# EAGLE board LM4702 (EAGLE 5.07)
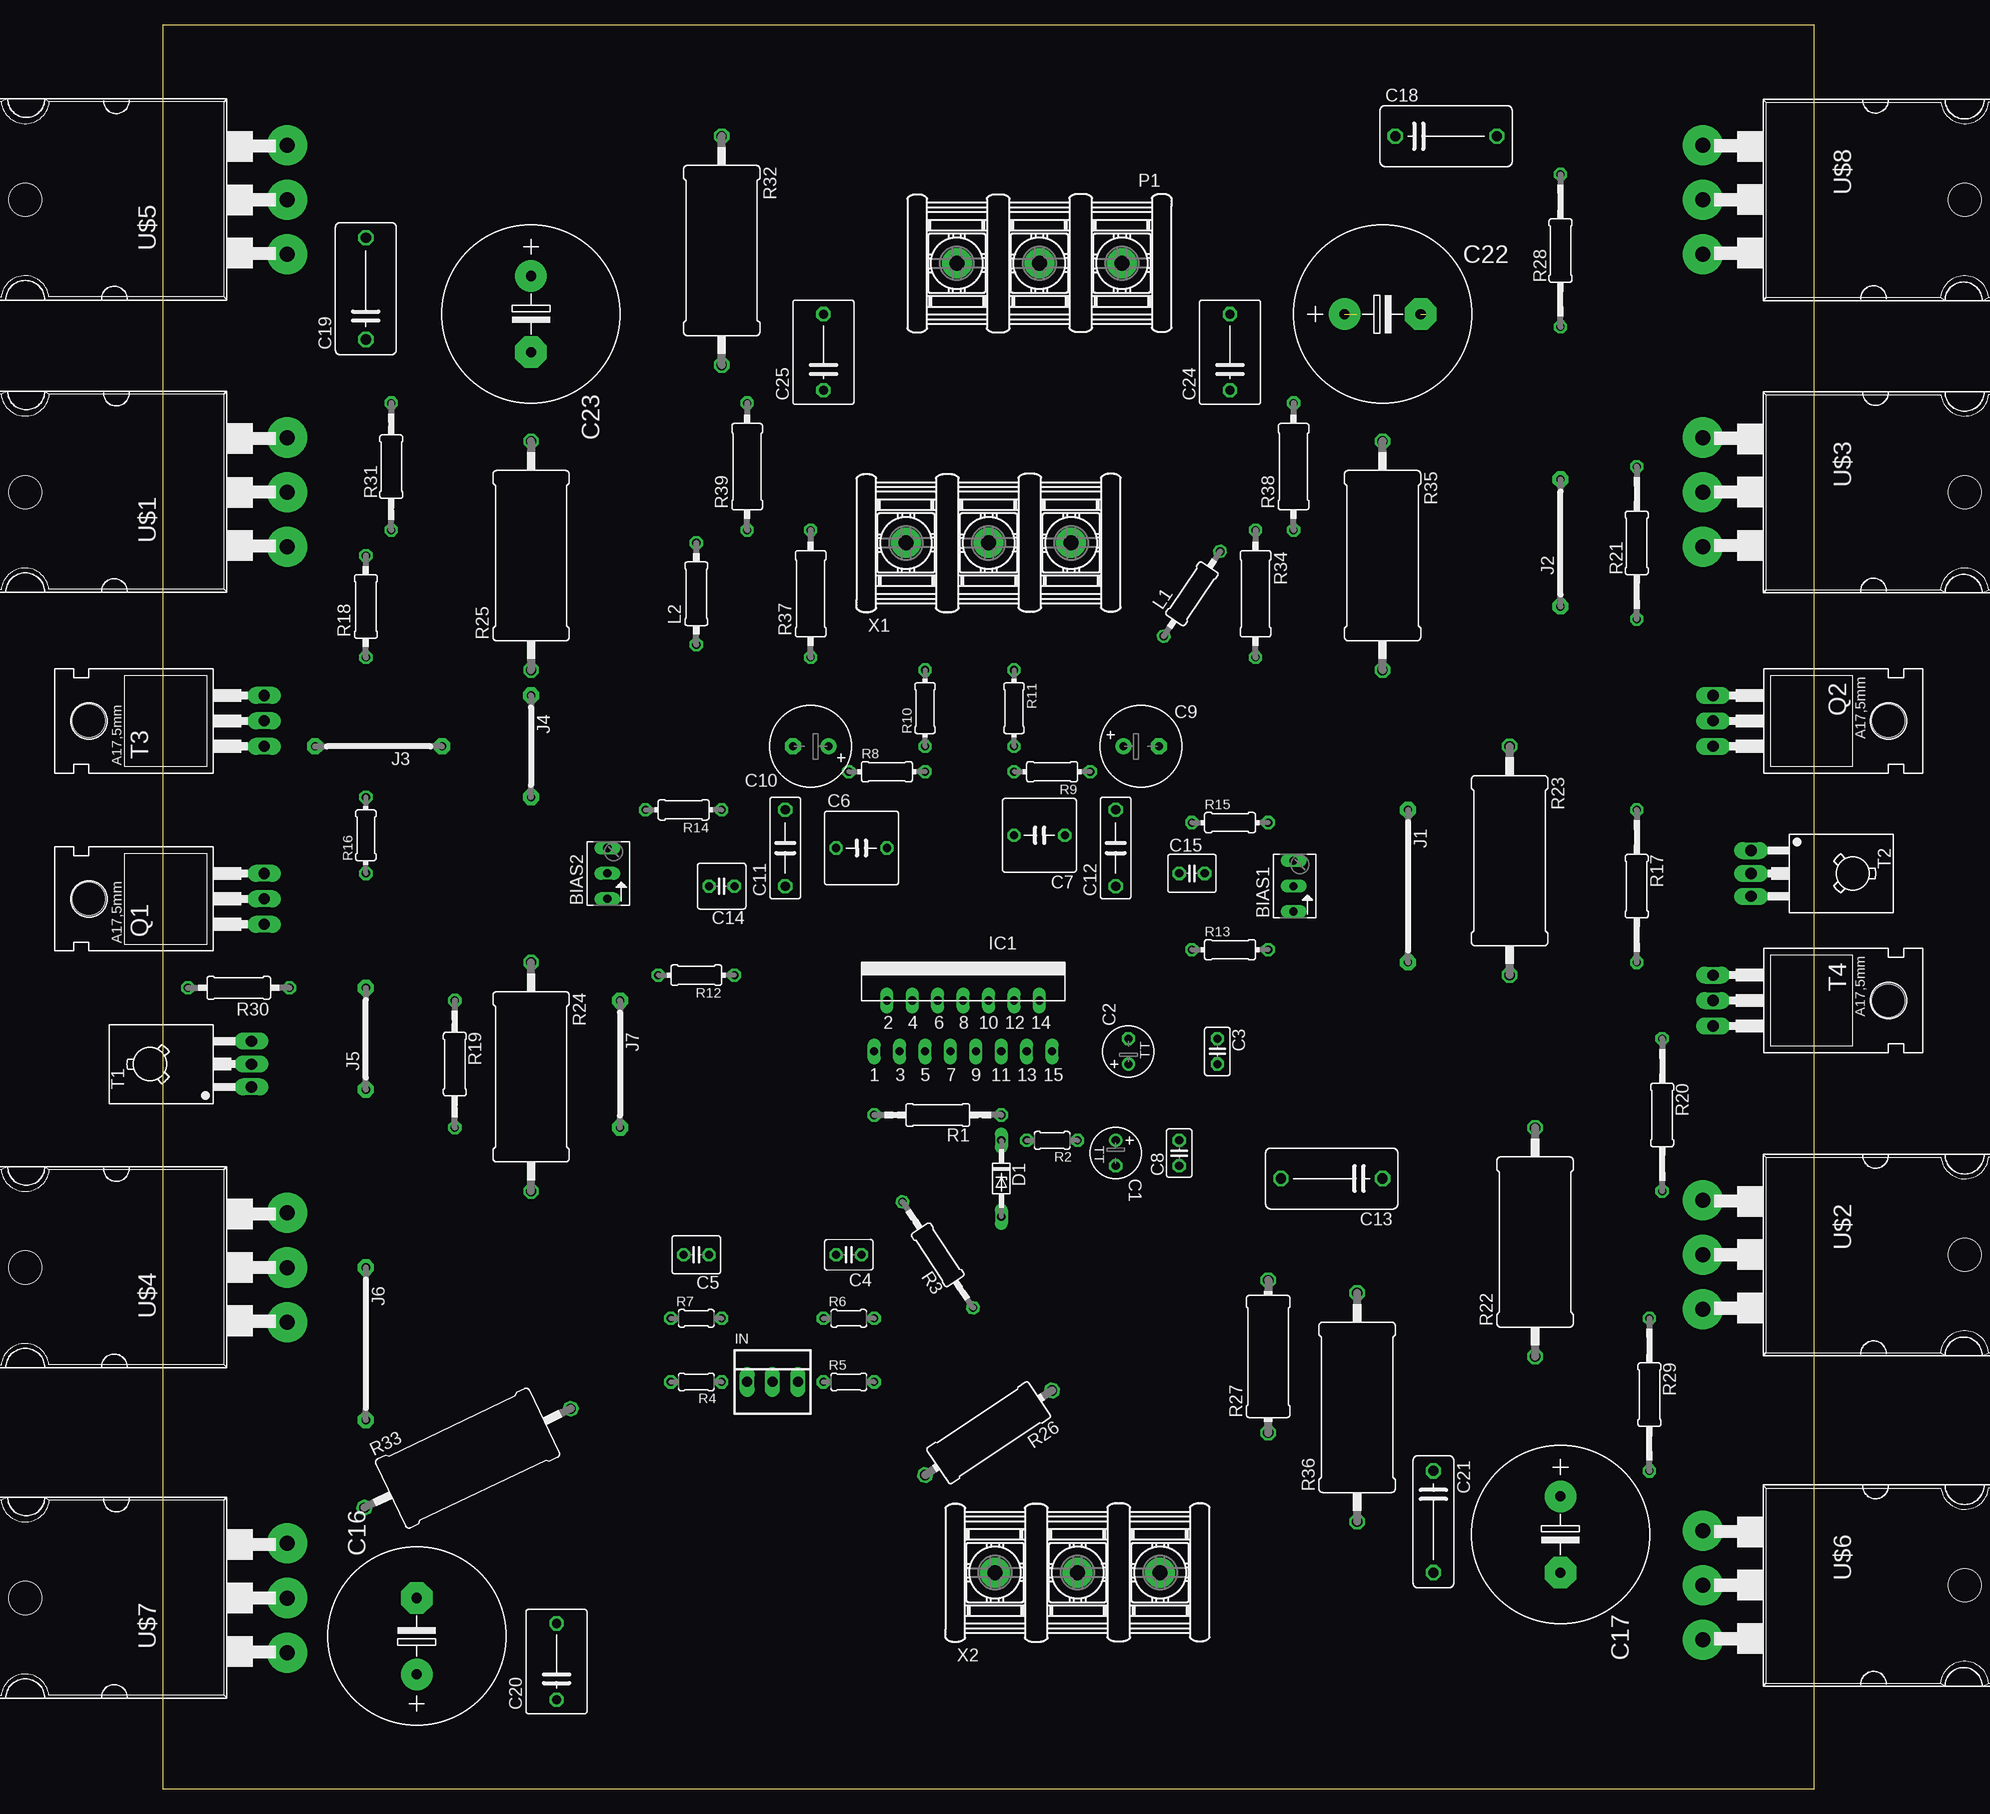
[diagram p0: board, top side]
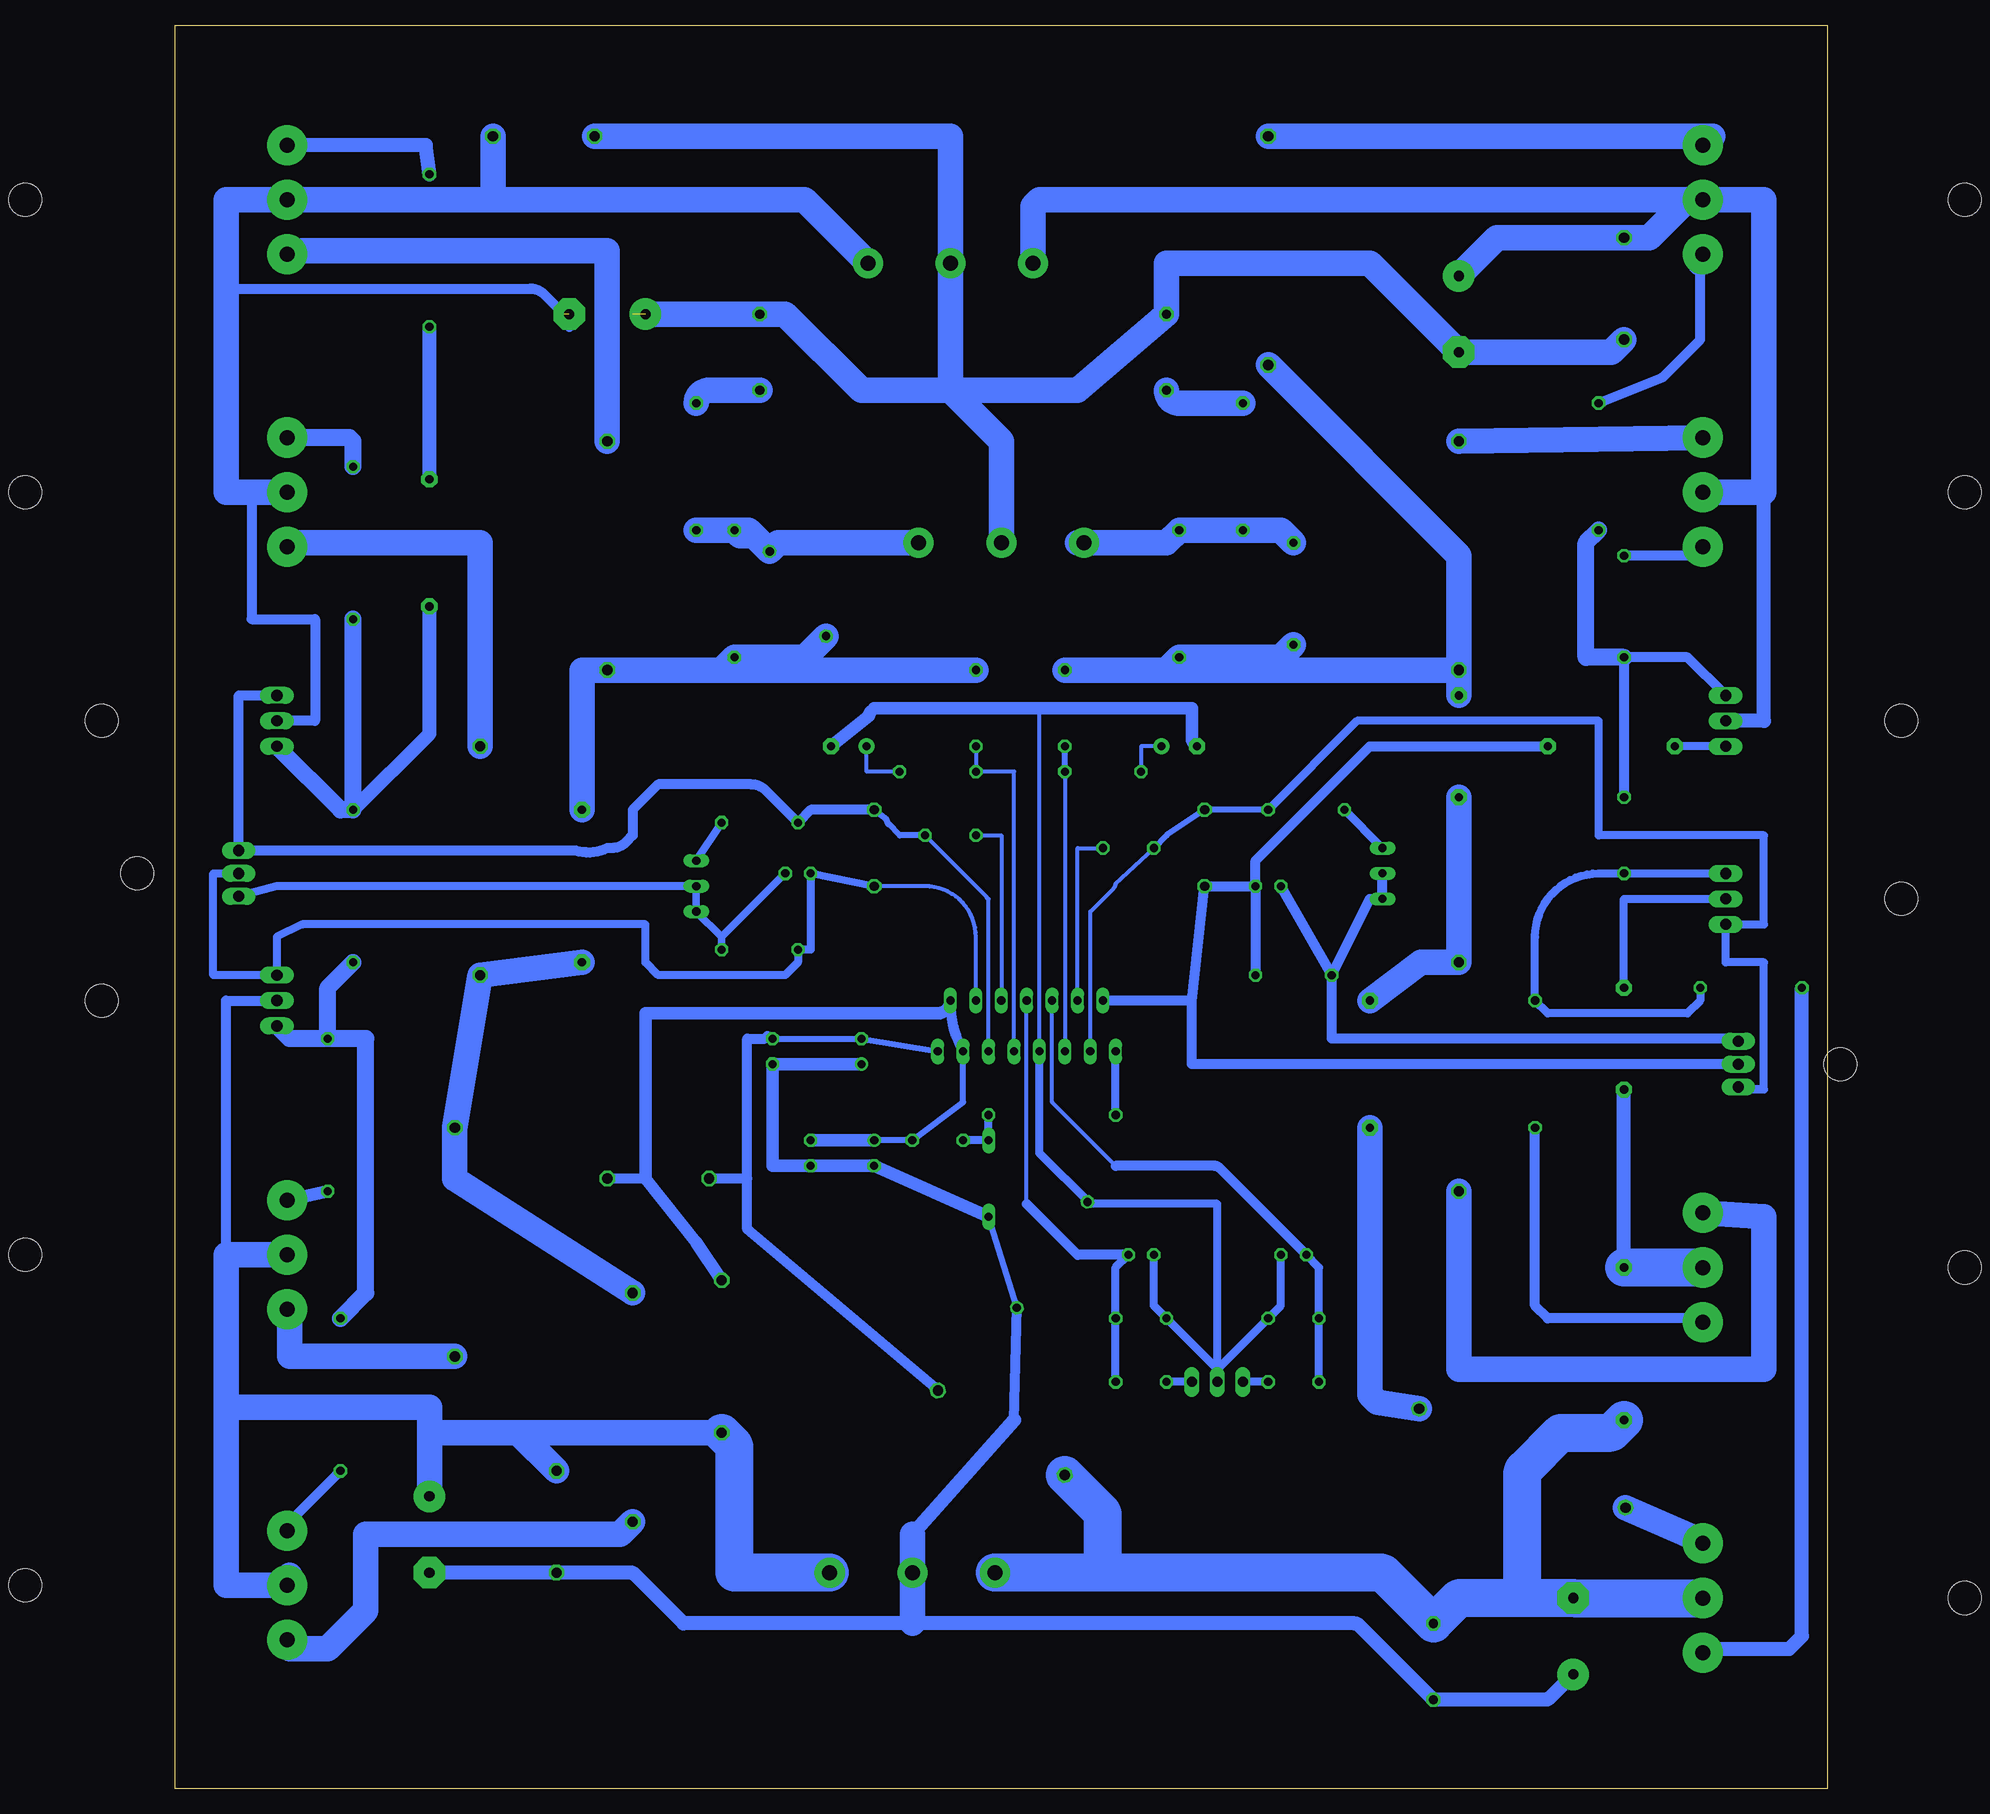
[diagram p1: board, bottom side, seen from below]

Size 165.08 x 176.2 mm. Coordinates in mm from the lower left corner, seen from the top.
Outline: 0,0 165.08,0 165.08,176.2 0,176.2 0,0
Copper layers (1*16): Top 0.035mm / dielectric 1.5mm / Bottom 0.035mm
Design rules "default *": minimum track width 24mil, minimum drill 24mil, track to track 8mil, track to pad 8mil, pad to pad 8mil, via to via 8mil, smd to smd 8mil, copper to edge 40mil, drill to drill 8mil, minimum pad ring 10mil, minimum via ring 8mil, stop-mask expansion 4mil, vias tented up to drill 0mil, thermal gap 10mil

## Footprints (pad centres in the part's own frame; a part is rotated, then mirrored left to right if it is on the bottom)
B64Y = drill 0.813 long: A 2.54,0; E -2.54,0; S 0,0
TT2D5 = drill 0.813 round: + -1.27,0 | drill 0.813 octagon: - 1.27,0
C025-025X050 = drill 0.813 octagon: 1 -1.27,0; 2 1.27,0
C025-030X050 = drill 0.813 octagon: 1 -1.27,0; 2 1.27,0
C025-040X050 = drill 0.813 octagon: 1 -1.27,0; 2 1.27,0
C050-075X075 = drill 0.813 octagon: 1 -2.54,0; 2 2.54,0
E3,5-8 = drill 0.813 pad 1.6 round: + -1.778,0 | drill 0.813 pad 1.6 octagon: - 1.778,0
C075-032X103 = drill 0.914 octagon: 1 -3.81,0; 2 3.81,0
C102-064X133 = drill 1.016 octagon: 1 -5.08,0; 2 5.08,0
C025-050X050 = drill 0.813 octagon: 1 -1.27,0; 2 1.27,0
E7,5-18 = drill 1.016 pad 3.15 round: + -3.81,0 | drill 1.016 pad 3.15 octagon: - 3.81,0
C075-063X106 = drill 0.914 octagon: 1 -3.81,0; 2 3.81,0
C102-043X133 = drill 1.016 octagon: 1 -5.08,0; 2 5.08,0
DO34Z7 = drill 0.813 long: A 3.81,0; C -3.81,0
SIP15 = drill 0.813 pad 1.321 long: 1 -8.89,-2.54; 2 -7.62,2.54; 3 -6.35,-2.54; 4 -5.08,2.54; 5 -3.81,-2.54; 6 -2.54,2.54; 7 -1.27,-2.54; 8 0,2.54; 9 1.27,-2.54; 10 2.54,2.54; 11 3.81,-2.54; 12 5.08,2.54; 13 6.35,-2.54; 14 7.62,2.54; 15 8.89,-2.54
22-23-2031 = drill 1 long: 1 -2.54,0; 2 0,0; 3 2.54,0
15 = drill 0.813 pad 1.6 octagon: 1 -7.62,0; 2 7.62,0
12 = drill 0.813 pad 1.6 octagon: 1 -6.35,0; 2 6.35,0
10 = drill 0.813 pad 1.6 octagon: 1 -5.08,0; 2 5.08,0
0207/10 = drill 0.813 octagon: 1 -5.08,0; 2 5.08,0
5202-03-N-02 = drill 1.5 pad 3 round: 1 -8.25,0; 2 0,0; 3 8.25,0
TO220 = drill 1.118 long: 1 -2.54,-6.35; 2 0,-6.35; 3 2.54,-6.35 | hole 3.302: 0,11.176
0207/12 = drill 0.813 octagon: 1 -6.35,0; 2 6.35,0
0204/5 = drill 0.813 octagon: 1 -2.54,0; 2 2.54,0
0204/7 = drill 0.813 octagon: 1 -3.81,0; 2 3.81,0
0207/15 = drill 0.813 octagon: 1 -7.62,0; 2 7.62,0
P0817/22 = drill 1.016 octagon: 1 -11.43,0; 2 11.43,0
0414/15 = drill 1.016 octagon: 1 -7.62,0; 2 7.62,0
0309/12 = drill 0.813 octagon: 1 -6.35,0; 2 6.35,0
TO126 = drill 1.118 long: 1 -2.286,-5.08; 2 0,-5.08; 3 2.286,-5.08 | hole 3.302: 0,5.08
TO-264 = drill 1.5 pad 4 round: B -5.45,-6.096; E 5.45,-6.096 | drill 1.499 pad 4 round: C 0,-6.096 | hole 3.3: 0,20.09

## Placement (x,y rotation side)
BIAS1  200R  [B64Y]  113.03,90.17 90 top
BIAS2  200R  [B64Y]  44.45,91.44 90 top
C1  10uF  [TT2D5]  95.25,63.5 270.1 top
C2  10uF  [TT2D5]  96.52,73.66 90 top
C3  .1  [C025-025X050]  105.41,73.66 270 top
C4  47pF  [C025-030X050]  68.58,53.34 180.2 top
C5  47pF  [C025-040X050]  53.34,53.34 180 top
C6  47pF  [C050-075X075]  69.85,93.98 0 top
C7  47pF  [C050-075X075]  87.63,95.25 180 top
C8  .1  [C025-025X050]  101.6,63.5 90 top
C9  200uF  [E3,5-8]  97.79,104.14 0 top
C10  200uF  [E3,5-8]  64.77,104.14 180 top
C11  15nf  [C075-032X103]  62.23,93.98 90 top
C12  15nf  [C075-032X103]  95.25,93.98 90 top
C13  .27  [C102-064X133]  116.84,60.96 180 top
C14  47pf  [C025-050X050]  55.88,90.17 180 top
C15  47pf  [C025-040X050]  102.87,91.44 0 top
C16  100uF  [E7,5-18]  25.4,15.24 90 top
C17  100uF  [E7,5-18]  139.7,25.4 270 top
C18  .1  [C102-064X133]  128.27,165.1 0 top
C19  .1  [C102-064X133]  20.32,149.86 90 top
C20  .1  [C075-063X106]  39.37,12.7 90 top
C21  .1  [C102-043X133]  127,26.67 270 top
C22  100uF  [E7,5-18]  121.92,147.32 0 top
C23  100uF  [E7,5-18]  36.83,147.32 270 top
C24  .1  [C075-063X106]  106.68,143.51 90 top
C25  .1  [C075-063X106]  66.04,143.51 90 top
D1  BZV10  [DO34Z7]  83.82,60.96 270 top
IC1  LM4702  [SIP15]  80.01,76.2 0 top
IN  Input  [22-23-2031]  60.96,40.64 0 top
J1  J15MM  [15]  124.46,90.17 270 top
J2  J12MM  [12]  139.7,124.46 90 top
J3  J12MM  [12]  21.59,104.14 180 top
J4  J10MM  [10]  36.83,104.14 270 top
J5  J10MM  [10]  20.32,74.93 90 top
J6  J15MM  [15]  20.32,44.45 270 top
J7  J12MM  [12]  45.72,72.39 270 top
L1  3uH  [0207/10]  102.87,119.38 56.3 top
L2  3uH  [0207/10]  53.34,119.38 90 top
P1  (V+) (GND) (V-)  [5202-03-N-02]  87.63,152.4 180 top
Q1  MJE15031  [TO220]  3.81,88.9 90 top
Q2  MJE15031  [TO220]  161.29,106.68 270 top
R1  27K  [0207/12]  77.47,67.31 180 top
R2  33K  [0204/5]  88.9,64.77 180 top
R3  0.0  [0207/12]  77.47,53.34 123.8 top
R4  2.7K  [0204/5]  53.34,40.64 180 top
R5  2.7K  [0204/5]  68.58,40.64 0 top
R6  68K  [0204/5]  68.58,46.99 0 top
R7  68K  [0204/5]  53.34,46.99 0 top
R8  2.7k  [0204/7]  72.39,101.6 0 top
R9  2.7k  [0204/7]  88.9,101.6 180 top
R10  68k  [0204/7]  76.2,107.95 90 top
R11  68k  [0204/7]  85.09,107.95 270 top
R12  1.2k  [0204/7]  53.34,81.28 180 top
R13  1.2k  [0204/7]  106.68,83.82 0 top
R14  290  [0204/7]  52.07,97.79 180 top
R15  290  [0204/7]  106.68,96.52 0 top
R16  220  [0204/7]  20.32,95.25 90 top
R17  220  [0207/15]  147.32,90.17 270 top
R18  10  [0207/10]  20.32,118.11 90 top
R19  10  [0207/12]  29.21,72.39 270 top
R20  10  [0207/15]  149.86,67.31 270 top
R21  10  [0207/15]  147.32,124.46 90 top
R22  .47  [P0817/22]  137.16,54.61 90 top
R23  .47  [P0817/22]  134.62,92.71 270 top
R24  .47  [P0817/22]  36.83,71.12 270 top
R25  .47  [P0817/22]  36.83,123.19 90 top
R26  10  [0414/15]  82.55,35.56 213.7 top
R27  10  [0414/15]  110.49,43.18 90 top
R28  10  [0207/15]  139.7,153.67 90 top
R29  10  [0207/15]  148.59,39.37 270 top
R30  10  [0207/10]  7.62,80.01 180 top
R31  10  [0207/12]  22.86,132.08 90 top
R32  .47  [P0817/22]  55.88,153.67 270 top
R33  .47  [P0817/22]  30.48,33.02 25.6 top
R34  10  [0309/12]  109.22,119.38 270 top
R35  .47  [P0817/22]  121.92,123.19 270 top
R36  .47  [P0817/22]  119.38,38.1 90 top
R37  10  [0309/12]  64.77,119.38 90 top
R38  10  [0309/12]  113.03,132.08 90 top
R39  10  [0309/12]  58.42,132.08 90 top
T1  BD139  [TO126]  3.81,72.39 90 top
T2  BD139  [TO126]  163.83,91.44 270 top
T3  MJE15030  [TO220]  3.81,106.68 90 top
T4  MJE15030  [TO220]  161.29,78.74 270 top
U$1  2SC5200  [TO-264]  6.35,129.54 90 top
U$2  2SC5200  [TO-264]  160.02,53.34 270 top
U$3  2SA1943  [TO-264]  160.02,129.54 270 top
U$4  2SA1943  [TO-264]  6.35,52.07 90 top
U$5  2SC5200  [TO-264]  6.35,158.75 90 top
U$6  2SA5200  [TO-264]  160.02,20.32 270 top
U$7  2SA1943  [TO-264]  6.35,19.05 90 top
U$8  2SA1943  [TO-264]  160.02,158.75 270 top
X1  Speaker Out  [5202-03-N-02]  82.55,124.46 0 top
X2  (V-) (GND) (V+)  [5202-03-N-02]  91.44,21.59 0 top

## Library data of the parts
BIAS1 BIAS2 = pot
C1-C3 C8 C14 C15 R12-R15 = rcl
C4-C7 C9-C13 C16-C25 L1 L2 R1-R11 R16-R39 = resistor
D1 = diode
IC1 = LM4702
IN = con-molex
J1-J7 = jumper
P1 X1 X2 = con-ebyelectro
Q1 Q2 = transistor-pnp
T1 T2 = transistor-neu-to92
T3 T4 = transistor
U$1-U$8 = Rudi_TO264

## Nets
0V: C18.1 C19.1 C22.+ C23.- C24.2 C25.2 P1.2 X1.2
+24V: C1.+ C8.2 C13.1 IC1.13 IC1.14 R2.1 R27.2
-24V: C2.- C3.1 C13.2 IC1.15 R26.1
GND: C4.2 C5.1 C9.- C10.- IC1.7 IN.2 R3.2 R6.1 R7.2
N$1: IN.1 R4.1
N$2: IC1.1 R1.2
N$3: D1.C R1.1 R2.2
N$4: IN.3 R5.1
N$5: C4.1 IC1.8 R5.2 R6.2
N$6: C10.+ R8.1
N$7: C6.2 IC1.4
N$8: C7.1 C12.2 IC1.11 Q2.1 R15.1 T2.1
N$9: C7.2 IC1.10
N$10: C6.1 C11.2 IC1.3 Q1.1 R14.1 T1.1
N$11: J4.2 J7.1 R24.1
N$12: C12.1 C15.1 IC1.12 R13.1 T2.2 T4.1
N$13: IC1.5 R8.2 R10.1
N$14: IC1.9 R9.2 R11.2
N$15: C9.+ R9.1
N$16: C5.2 IC1.6 R4.2 R7.1
N$17: J4.1 L2.1 R10.2 R25.1 R32.2 R37.1
N$18: J1.1 L1.1 R11.1 R34.2 R35.2
N$19: BIAS1.E BIAS1.S C15.2 R13.2 T2.3
N$20: BIAS2.E BIAS2.S C14.2 R12.2 T1.3
N$21: BIAS2.A R14.2
N$22: BIAS1.A R15.2
N$23: R17.2 R20.1 R29.1 T4.3
N$24: J2.2 R28.1
N$25: Q1.3 R16.1 R19.1 R30.1
N$26: R16.2 R18.1 R31.1 T3.3
N$27: R18.2 U$1.B
N$29: R21.2 U$3.B
N$30: C11.1 C14.1 IC1.2 J3.1 R12.1 T1.2
N$31: R28.2 U$8.B
N$32: J5.1 J6.1 U$4.C
N$33: L1.2 R34.1 R38.1 X1.3
N$34: J2.1 Q2.3 R17.1 R21.1
N$35: R22.1 U$2.E
N$36: R23.1 U$3.E
N$37: R24.2 U$4.E
N$38: J1.2 R22.2 R23.2 R36.2
N$39: R20.2 U$2.B
N$40: R25.2 U$1.E
N$41: R19.2 U$4.B
N$42: J3.2 T3.1
N$43: J5.2 Q1.2
N$44: R29.2 U$6.B
N$45: R30.2 U$7.B
N$46: R31.2 U$5.B
N$47: R32.1 U$5.E
N$48: R33.1 U$7.E
N$49: J7.2 R33.2
N$50: R35.1 U$8.E
N$51: R36.1 U$6.E
N$52: L2.2 R37.2 R39.1 X1.1
N$53: C25.1 R39.2
N$56: C24.1 R38.2
PE: C1.- C2.+ C3.2 C8.1 C16.+ C17.- C20.1 C21.2 D1.A R3.1 X2.2
V+: C19.2 C23.+ P1.3 T3.2 U$1.C U$5.C
V-: C18.2 C22.- P1.1 Q2.2 U$3.C U$8.C
VPP: C17.+ C21.1 R27.1 T4.2 U$2.C U$6.C X2.3
VSS: C16.- C20.2 J6.2 R26.2 U$7.C X2.1

## Tracks (layer width: path | path; a pad name or v marks a point on that pad's centre or on a via)
0V  (1 unrouted)
  Bottom 2.54: C19.1 21.59,143.51 C23.- 45.72,152.4 66.04,152.4 C25.2 74.93,139.7 87.63,139.7 | C18.1 87.63,165.1 P1.2 87.63,139.7 | 87.63,139.7 82.55,134.62 X1.2 | C22.+ C24.2 104.14,147.32 96.52,139.7 87.63,139.7
+24V
  Bottom 0.61: C1.+ 95.76,65.02 | IC1.13 86.36,68.58 R2.1 C1.+ | C1.+
  Bottom 1.016: IC1.13 arc28 IC1.14 | 118.11,60.96 C13.1
  Bottom 1.27: C1.+ 95.76,64.77 C8.2 | R27.2 113.03,54.61 118.11,60.96 118.11,77.47 88.9,77.47 arc-90 IC1.14
-24V
  Bottom 0.61: IC1.15 C2.- C3.1 105.92,75.18 | 107.95,60.96 107.95,60.71
  Bottom 1.016: 107.95,60.96 C13.2 | 105.92,75.18 106.17,74.93 107.95,74.93 107.95,60.96 | R26.1 107.95,55.88 107.95,60.96
GND
  Bottom 0.406: IC1.7 78.74,80.01 78.74,107.95
  Bottom 0.813: C5.1 54.61,48.26 R7.2 60.96,41.91 | C4.2 67.31,48.26 R6.1 60.96,41.91 | 73.66,58.42 78.74,63.5 IC1.7 | 73.66,58.42 60.96,58.42 IN.2 60.96,41.91 | 73.66,58.42 R3.2
  Bottom 1.27: C10.- 63.31,104.46 arc45 63.5,104.91 63.5,107.95 78.74,107.95 95.25,107.95 95.57,107.63 arc-45 95.76,107.18 C9.-
N$1
  Bottom 0.813: R4.1 IN.1
N$2
  Bottom 0.813: R1.2 IC1.1
N$3
  Bottom 0.813: R1.1 D1.C R2.2
N$4
  Bottom 0.813: IN.3 R5.1
N$5
  Bottom 0.406: 80.01,58.42 IC1.8 | C4.1
  Bottom 0.813: R5.2 R6.2 71.12,52.07 C4.1
  Bottom 1.016: C4.1 74.93,53.34 80.01,58.42
N$6
  Bottom 0.406: C10.+ 68.58,104.14 R8.1
N$7
  Bottom 0.406: IC1.4 74.93,93.98 C6.2
N$8
  Bottom 0.406: C7.1 84.01,89.09 arc-90 83.82,88.9 IC1.11
  Bottom 0.61: C7.1 92.71,95.25 93.79,96.33 arc45 93.98,96.78 C12.2
  Bottom 1.016: C12.2 101.6,97.79 R15.1 106.09,99.74 arc-45 107.51,100.33 116.84,100.33 119.38,97.79 119.38,95.25 120.06,94.57 arc45 121.48,93.98 121.92,93.98 arc45 125.07,93.73 T2.1 158.75,109.22 Q2.1
N$9
  Bottom 0.406: C7.2 82.55,95.25 IC1.10
N$10
  Bottom 0.305: T1.1 6.35,70.1 6.35,82.55
  Bottom 0.406: IC1.3 73.66,87.63 71.31,89.98 arc-45 71.12,90.43 C6.1
  Bottom 0.61: 56.13,97.54 R14.1 C11.2 66.04,95.25 C6.1
  Bottom 0.813: T1.1 8.64,69.85 6.35,69.85 6.35,82.55 10.16,82.55 Q1.1 6.35,86.36 6.35,95.25 22.86,95.25 22.86,106.68 46.99,106.68 R14.1
N$11
  Bottom 2.54: J4.2 R24.1 40.64,82.55 J7.1
N$12
  Bottom 0.406: IC1.12 85.09,85.09 arc-90 90.17,90.17 C12.1
  Bottom 0.762: C12.1 C15.1
  Bottom 0.813: C15.1 101.6,83.82 R13.1 102.87,82.55 104.14,81.28 116.84,81.28 118.11,82.55 118.11,86.36 152.4,86.36 154.94,85.09 T4.1 161.29,81.28 161.29,91.44 T2.2
N$13
  Bottom 0.406: R8.2 IC1.5
  Bottom 0.61: R8.2 R10.1
N$14
  Bottom 0.406: IC1.9 81.28,101.6 R9.2 R11.2
N$15
  Bottom 0.406: R9.1 96.01,101.6 C9.+
N$16
  Bottom 0.406: 71.12,62.23 77.47,68.58 IC1.6
  Bottom 0.813: R4.2 R7.1 50.8,52.07 C5.2
  Bottom 1.016: C5.2 60.77,62.04 arc-45 61.22,62.23 71.12,62.23
N$17
  Bottom 2.54: J4.1 R25.1 | R25.1 36.83,123.19 R32.2 | R25.1 66.04,111.76 | 66.04,111.76 R10.2 67.31,111.76 | L2.1 54.61,113.03 R37.1 66.04,111.76
N$18
  Bottom 2.54: R35.2 124.46,111.76 J1.1 | R11.1 R35.2 | L1.1 102.17,113.03 R34.2 110.49,111.76 R35.2
N$19
  Bottom 0.61: 157.73,89.41 158.75,89.41 T2.3
  Bottom 0.762: 110.49,85.09 R13.2 | 110.49,85.09 BIAS1.E BIAS1.S | C15.2 110.49,85.09
  Bottom 0.813: BIAS1.S 154.94,90.17 157.73,89.41 158.75,88.9
N$20
  Bottom 0.61: T1.3 8.96,74.74 arc-45 9.41,74.93
  Bottom 1.016: BIAS2.S BIAS2.E 45.72,88.9 R12.2 | R12.2 C14.2 | 9.41,74.93 49.53,74.93 R12.2
N$21
  Bottom 0.813: BIAS2.A R14.2
N$22
  Bottom 0.762: BIAS1.A R15.2
N$23
  Bottom 1.676: R29.1 146.05,49.53 146.05,74.93 R20.1 | T4.3 153.67,74.93 R20.1 | R17.2 149.86,80.01 R20.1
N$24
  Bottom 1.422: J2.2 R28.1
N$25
  Bottom 0.813: Q1.3 R16.1 22.86,91.44 arc-90 29.21,85.09 R19.1 27.94,77.47 13.97,77.47 12.7,78.74 R30.1
N$26
  Bottom 1.016: T3.3 13.97,113.03 R18.1 R16.2
  Bottom 1.676: R31.1 24.13,124.46 24.13,113.03 R18.1
N$27
  Bottom 1.016: U$1.B 13.35,123.19 R18.2
N$29
  Bottom 1.676: R21.2 147.32,134.62 147.69,134.99 U$3.B
N$30
  Bottom 1.016: T1.2 63.5,72.39 63.5,78.74 | 63.5,78.74 C11.1 C14.1 | 63.5,78.74 IC1.2 | C14.1 R12.1 | C14.1 57.15,92.71 45.72,104.14 J3.1
N$31
  Bottom 1.422: R28.2 140.07,164.2 U$8.B
N$32
  Bottom 1.422: J6.1 J5.1
  Bottom 3.81: U$4.C J6.1
N$33
  Bottom 2.54: 107.25,125.16 L1.2 104.83,124.46 X1.3 | 107.25,125.16 107.81,125.73 R34.1 | R34.1 R38.1 | R34.1 108.65,125.16 107.25,125.16
N$34
  Bottom 1.422: R17.1 139.7,105.41 J2.1
  Bottom 1.676: R21.1 R17.1 148.59,97.79 Q2.3
N$35
  Bottom 2.54: R22.1 153.67,43.18 153.67,46.99 153.92,46.99 U$2.E
N$36
  Bottom 2.54: R23.1 134.62,124.46 153.92,124.46 U$3.E
N$37
  Bottom 2.54: U$4.E 6.35,57.15 6.35,41.91 36.83,41.91 R24.2
N$38
  Bottom 2.54: J1.2 R23.2 R22.2 137.16,60.96 R36.2
N$39
  Bottom 0.61: U$2.B 153.67,58.93
  Bottom 0.813: 153.67,59.68 153.67,58.93 153.67,58.42
  Bottom 1.27: R20.2 U$2.B
N$40
  Bottom 2.54: U$1.E R25.2
N$41
  Bottom 1.016: U$4.B arc-45 13.34,46.99 27.94,46.99 29.21,48.26 R19.2
N$42
  Bottom 0.813: T3.1 J3.2
N$43
  Bottom 0.813: J5.2 20.32,88.9 Q1.2
N$44
  Bottom 0.813: U$6.B 153.92,26.42
  Bottom 1.016: 153.92,26.42 R29.2
N$45
  Bottom 1.422: U$7.B 12.08,13.97 3.81,13.97 2.54,15.24 R30.2
N$46
  Bottom 1.016: 12.7,152.4 12.7,144.78 16.51,140.97 R31.2
  Bottom 2.54: 12.7,153.55 U$5.B | 12.7,153.55 12.7,153.67 | 12.7,152.4 12.7,153.55
N$47
  Bottom 2.54: U$5.E 12.7,163.95 12.7,163.83 11.43,165.1 R32.1
N$48
  Bottom 2.54: U$7.E 12.83,24.89 R33.1
N$49
  Bottom 2.54: J7.2 45.72,39.37 44.96,38.61 R33.2
N$50
  Bottom 2.54: R35.1 121.92,153.67 152.4,153.67 154.57,153.3 U$8.E
N$51
  Bottom 2.54: R36.1 120.65,25.4 146.05,25.4 146.05,17.78 149.86,13.97 153.67,13.97 153.92,14.22 U$6.E
N$52
  Bottom 2.54: L2.2 54.61,125.73 R39.1 R37.2 66.04,124.46 X1.1 74.93,124.46
N$53
  Bottom 2.54: R39.2 64.77,138.43 arc90 C25.1
N$56
  Bottom 2.54: C24.1 111.76,139.7 arc-90 R38.2
PE
  Bottom 0.61: R3.1 D1.A | C20.1 38.86,9.14
  Bottom 1.016: 81.28,36.83 R3.1
  Bottom 1.27: D1.A C1.- C8.1 105.41,62.23 C3.2 C2.+
  Bottom 1.422: C17.- C21.2 119.64,21.59 arc45 119.19,21.4 114.3,16.51 91.44,16.51 47.25,16.51 arc45 46.8,16.32 C20.1 28.2,8.89 arc-45 27.75,9.08 C16.+ | 91.44,25.4 81.28,36.83
  Bottom 2.54: 91.44,16.51 X2.2 91.44,24.13 91.44,25.4
V+
  Bottom 1.422: T3.2 6.35,106.68 6.35,129.54
  Bottom 2.54: U$1.C 6.35,129.54 6.35,158.75 U$5.C 13.97,158.75 | 13.97,158.75 78.74,158.75 79.38,158.11 P1.3 | C23.+ 33.02,154.94 C19.2 17.78,154.94 13.97,158.75
V-  (1 unrouted)
  Bottom 0.406: 154.94,129.54 U$3.C
  Bottom 0.813: 133.35,160.02 133.35,158.75
  Bottom 1.016: Q2.2 151.13,106.68 151.13,116.84 157.48,116.84 157.48,129.54 | 126.24,147.32 128.19,149.27 arc-45 129.61,149.86 160.02,149.86 | 125.73,146.05 C22.-
  Bottom 2.54: 154.94,129.54 157.48,129.54 160.02,129.54 160.02,149.86 160.02,158.75 U$8.C 133.35,158.75 102.23,158.75 P1.1 | C18.2 133.35,160.02
VPP
  Bottom 0.61: 153.67,21.34 U$6.C
  Bottom 1.016: T4.2 160.02,78.74 160.02,50.8
  Bottom 2.54: 160.02,38.1 139.7,38.1 139.7,35.56 | 160.02,38.1 160.02,50.8 160.02,53.34 U$2.C | 153.67,21.34 154.69,20.32 160.02,20.32 160.02,38.1 | 130.81,35.56 C21.1 | 130.81,35.56 139.7,35.56 | 139.7,35.56 C17.+ | R27.1 130.81,35.56
  Bottom 3.81: R27.1 109.41,34.48 arc45 109.22,34.03 109.22,21.59 X2.3
VSS
  Bottom 3.81: 72.39,21.59 44.71,21.59 arc45 44.26,21.4 C20.2 37.02,18.86 arc45 36.57,19.05 30.48,19.05 | 72.39,21.59 X2.1 | R26.2 72.58,27.7 arc45 72.39,27.25 72.39,21.59 | U$7.C C16.- 30.48,19.05 | J6.2 21.4,35.75 arc45 21.85,35.56 26.67,35.56 30.29,31.94 arc-45 30.48,31.49 30.48,19.05